# Altium PCB Плата CCD T9M.PCBDOC
Units mm, origin at the board's own origin, x right, y up, seen from the top; angles counter-clockwise.
Board outline 52.3 x 4.5 mm, 4 copper layers (Top Layer, Signal, GND, Bottom Layer), stack 0.856 mm thick; 7 components, 6 nets, 14 pads, 7 vias.
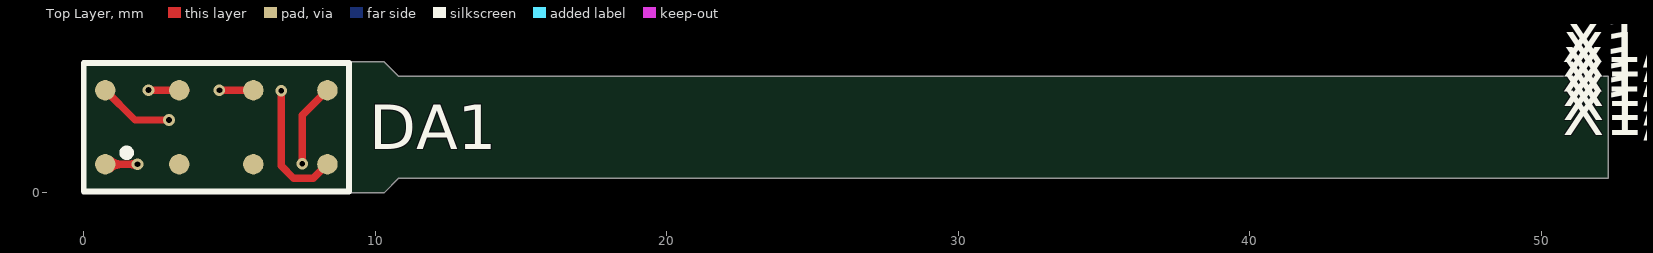
[diagram p0: Top Layer view]
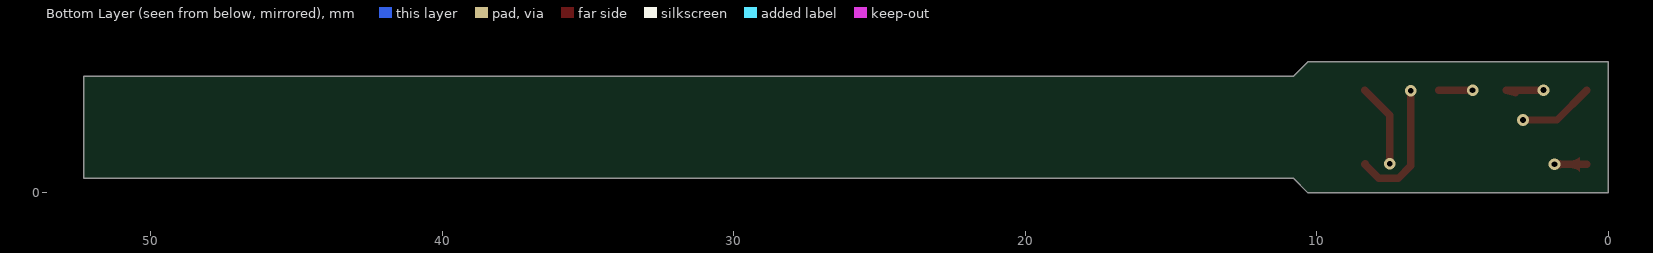
[diagram p1: Bottom Layer view, seen from below]
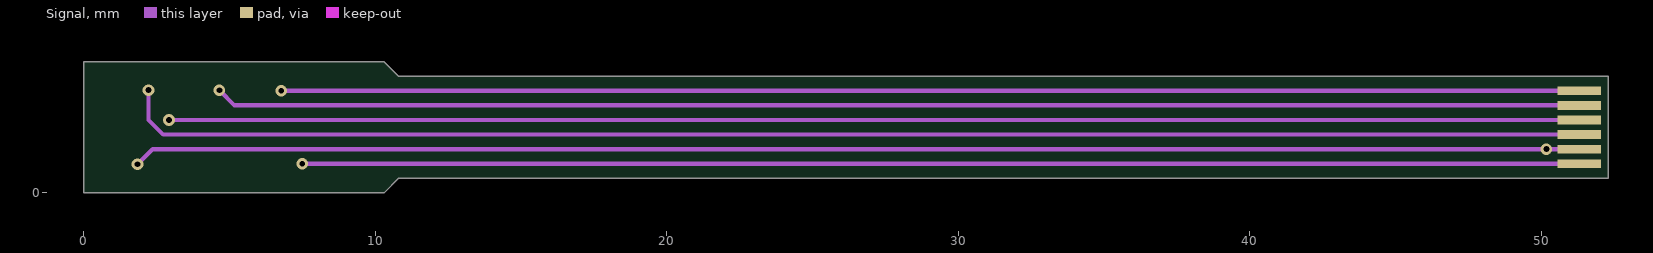
[diagram p2: Signal]
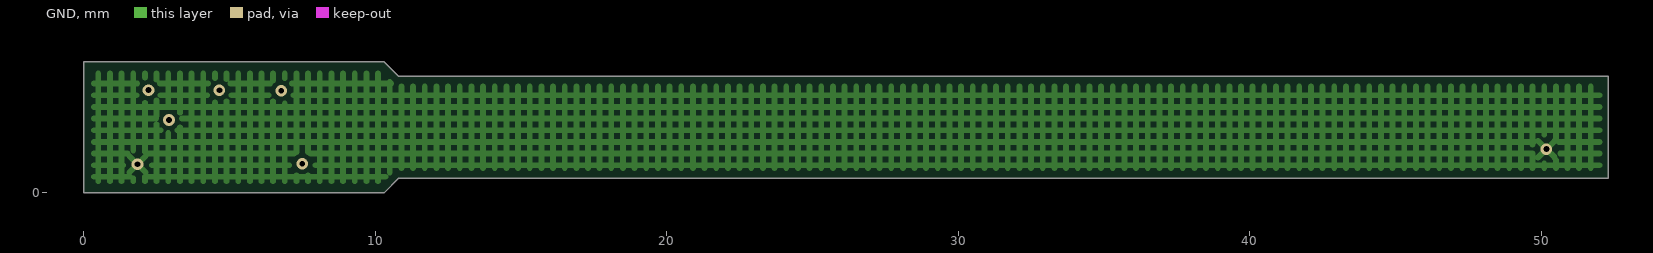
[diagram p3: GND]

## Layer stack, top to bottom
Top Solder: solder mask 0.0102, Solder Resist, Dk 3.5
Top Layer: signal copper 0.018
Dielectric 4: core 0.25, Dk 4.2
Dielectric 1: prepreg 0.127, Arlon 49N 1080+1080, Dk 4.2
Signal: signal copper 0.018
Dielectric 2: dielectric 0.012, AP8515R, Dk 3.4
GND: signal copper 0.018
Dielectric 3: prepreg 0.127, Arlon 49N 1080+1080, Dk 4.2
Dielectric 5: core 0.25, Dk 4.2
Bottom Layer: signal copper 0.0356
Bottom Solder: solder mask 0.0102, Solder Resist, Dk 3.5

## Board outline
0,0 0,4.5 10.3,4.5 10.8,4 52.3,4 52.3,0.5 10.8,0.5 10.3,0
board region "Layer Stack Region 1": 49.8,0.5 10.8,0.5 10.3,0 9.3,0 9.3,4.5 10.3,4.5 10.8,4 49.8,4
board region "Layer Stack Region 1": 9.3,0 0,0 0,4.5 9.3,4.5
board region "Layer Stack Region 1": 49.8,4 52.3,4 52.3,0.5 49.8,0.5

## Design rules (kind name [scope] priority, off if disabled: settings)
Clearance [All] p1: gap=0.15
ComponentClearance [All] p1: gap=0.15 collisioncheckmode=3 verticalgap=0.15 showdistances=FALSE
MinimumSolderMaskSliver [All] p1: minsoldermaskwidth=0.15
PolygonConnect [All] p1: connectstyle=Relief reliefconductorwidth=0.2 reliefentries=4 polygonreliefangle="45 Angle" airgapwidth=0.2
RoutingVias [All] p1: holewidth=0.3 width=0.6 viastyle="Through Hole" minholewidth=0.2 minwidth=0.4 maxholewidth=0.4 maxwidth=0.8
SilkToSolderMaskClearance [IsPad] p1: minsilkscreentomaskgap=0.15 clearancetoexposedcopper=TRUE
SolderMaskExpansion [All] p1: expansion=0.102
Width [All] p1: maxlimit=0.25 minlimit=0.1 preferedwidth=0.15
27 further rules are at their usual default settings.

## Components (designator, comment, footprint, x,y, rotation, side; value= is the part's Value field where it differs from the comment)
DA1 "S10227-10" S10227-10 0,0.05 r90 top
X1/1 "SolderPint" PCB_PAD#1 51.3,3.5 r180 top
X1/2 "SolderPint" PCB_PAD#2 51.3,3 r180 top
X1/3 "SolderPint" PCB_PAD#3 51.3,2.5 r180 top
X1/4 "SolderPint" PCB_PAD#4 51.3,2 r180 top
X1/5 "SolderPint" PCB_PAD#5 51.3,1.5 r180 top
X1/6 "SolderPint" PCB_PAD#6 51.3,1 r0 top

## Footprints (in the part's own frame and the unit in brackets; to place one, negate y for a bottom-side part, rotate by r counter-clockwise, add the part's x,y. Pads: shape width x height; smd on the part's side, far side on the other; paste and mask are expansions set on the pad)
PCB_PAD#1 [mm] "0.3x1.5"
  rect 1.5x0.3 on Mid1 mask+0: 1(0,0)
PCB_PAD#2 [mm] "0.3x1.5"
  rect 1.5x0.3 on Mid1 mask+0: 2(0,0)
PCB_PAD#3 [mm] "0.3x1.5"
  rect 1.5x0.3 on Mid1 mask+0: 3(0,0)
PCB_PAD#4 [mm] "0.3x1.5"
  rect 1.5x0.3 on Mid1 mask+0: 4(0,0)
PCB_PAD#5 [mm] "0.3x1.5"
  rect 1.5x0.3 on Mid1 mask+0: 5(0,0)
PCB_PAD#6 [mm] "0.3x1.5"
  rect 1.5x0.3 on Mid1 mask+0: 6(0,0)
S10227-10 [mm] "8-Leads, Body 4,40x9,10mmx1,60mm, Pitch 2,54mm"
  round 0.7 smd: 1(0.93,-0.74) 2(0.93,-3.28) 3(0.93,-5.82) 4(0.93,-8.36) 5(3.47,-8.36) 6(3.47,-5.82) 7(3.47,-3.28) 8(3.47,-0.74)
  silkscreen extent 0,-9.1 4.4,0, body extent 0,-9.1 4.4,0, height 1.6

## Part data
DA1: "Микросхема S10227-10"
X1/1 X1/2 X1/3 X1/4 X1/5 X1/6: library part SolderPoint

## Via types
v1: diameter 0.4, hole 0.2, Top Layer to Bottom Layer, 6 vias
v2: diameter 0.4/0.4 (per signal layer), hole 0.2, Signal to GND, 1 vias

## Nets (pads, with @x,y where several pads share a name; then routed paths per layer and width w, separated by ;. In a path a pad name is that pad's centre, name@x,y a point inside that pad or via, vN(x,y) a via of type N, cw(c..) or ccw(c..) an arc to the next point about the centre after c; other vN are vias at no path point)
+5V0: DA1.4 X1/1.1 | length 49.1
  Top Layer w0.25: v1(6.775,3.5) 6.775,0.925 7.2,0.5 7.88,0.5 DA1.4 DA1.4@8.34,1
  Signal w0.15: v1(6.775,3.5) X1/1.1
CCD_CLK: DA1.8 X1/3.3 | length 51
  Top Layer w0.25: DA1.8 1.76,2.5 v1(2.925,2.5)
  Signal w0.15: v1(2.925,2.5) X1/3.3
CCD_EOS: DA1.6 X1/2.2 | length 48
  Top Layer w0.25: v1(4.655,3.52) DA1.6
  Signal w0.15: v1(4.655,3.52) 5.175,3 X1/2.2
CCD_ST: DA1.7 X1/4.4 | length 51.9
  Top Layer w0.25: v1@2.205,3.52 DA1.7 3.505,3.52 3.298,3.459 DA1.7@3.185,3.425
  Signal w0.15: v1(2.225,3.525) 2.225,2.5 2.725,2 X1/4.4
CCD_VIDEO: DA1.5 X1/6.6 | length 46.7
  Top Layer w0.25: v1(7.5,1) 7.5,2.66 DA1.5
  Signal w0.15: v1(7.5,1) 8.55,1 X1/6.6
GND: DA1.1 X1/5.5 | length 50.8
  Top Layer w0.25: DA1.1 v1(1.845,0.98)
  Signal w0.15: v1(1.845,0.98) 2.365,1.5 X1/5.5
  other v2: 50.175,1.5
pads on no net: DA1.2 DA1.3

## Polygon pours and split planes (outlines as drawn)
GND on GND "GND-No Net" (hatched 90Degree grid 0.4 track 0.2, pour order 0): 0.35,4.1 0.35,0.4 10.2,0.4 10.65,0.85 52,0.85 52,3.65 10.65,3.65 10.2,4.1

## Silkscreen, mask and mechanical layers (free items; w line width, h text height)
Mechanical 10:
  lines w0.1: 0,0 0,4.5 9.3,4.5 10.3,4.5 10.8,4 52.3,4 52.3,0.5 10.8,0.5 10.3,0 9.3,0 0,0
Mechanical 13:
  lines w0.1: 52.3,0.5 52.3,4 10.8,4 10.3,4.5 9.3,4.5 9.3,0 10.3,0 10.8,0.5 52.3,0.5 ; 52.3,0.5 52.3,0.5
Mechanical 15:
  lines w0.1: 52.3,0.5 52.3,4 49.8,4 49.8,0.5 52.3,0.5 ; 52.3,0.5 52.3,0.5